# EAGLE board photodiode (EAGLE 7.6.0)
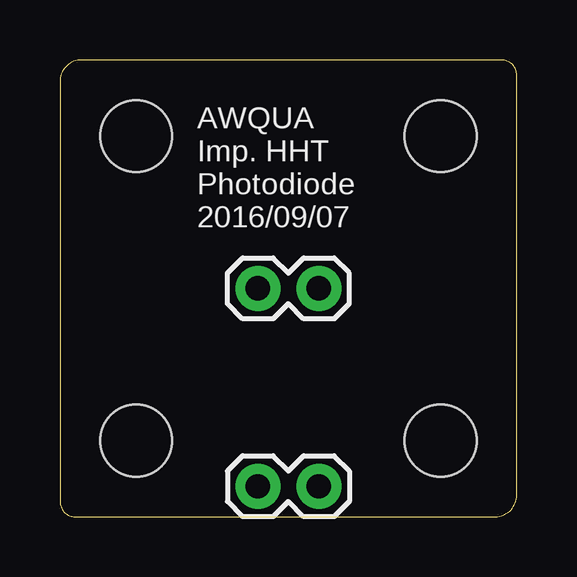
[diagram p0: board, top side]
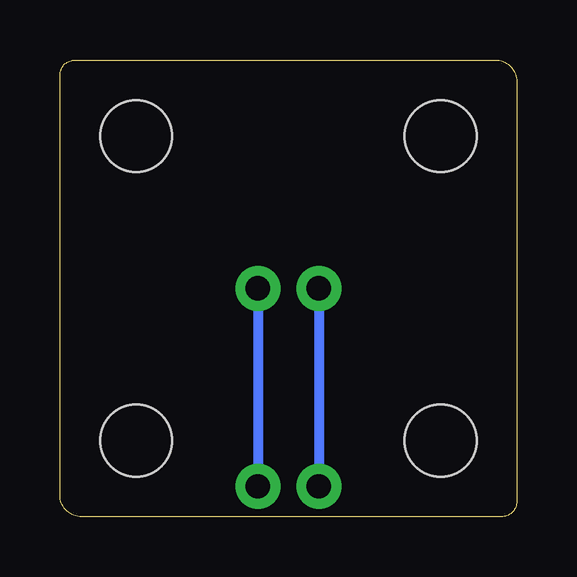
[diagram p1: board, bottom side, seen from below]

Size 19.05 x 19.05 mm. Coordinates in mm from the lower left corner, seen from the top.
Outline: 0,18.15 0,0.64 arc90 0.64,0 18.15,0 arc90 19.05,0.9 19.05,18.41 arc90 18.41,19.05 0.9,19.05 arc90 0,18.15
Copper layers (1*16): Top 0.035mm / dielectric 1.5mm / Bottom 0.035mm
Design rules "default": minimum track width 10mil, minimum drill 24mil, track to track 8mil, track to pad 8mil, pad to pad 8mil, via to via 8mil, smd to smd 8mil, copper to edge 40mil, drill to drill 8mil, minimum pad ring 10mil, minimum via ring 8mil, stop-mask expansion 4mil, vias tented up to drill 0mil, thermal gap 10mil
Holes 3 mm at 3.17,15.88 3.17,3.17 15.88,3.17 15.88,15.88

## Footprints (pad centres in the part's own frame; a part is rotated, then mirrored left to right if it is on the bottom)
1X02 = drill 1.016 pad 1.88: 1 0,0; 2 2.54,0

## Placement (x,y rotation side)
J1  [1X02]  8.26,1.27 0 top
J2  [1X02]  10.79,9.53 180 top

## Library data of the parts
J1 J2 = SparkFun-Connectors

## Nets
N$1: J1.2 J2.1
N$2: J1.1 J2.2

## Tracks (layer width: path | path; a pad name or v marks a point on that pad's centre or on a via)
N$1
  Bottom 0.406: J2.1 J1.2
N$2
  Bottom 0.406: J2.2 J1.1

## Text on the board
tNames: AWQUA / Imp. HHT / Photodiode / 2016/09/07